# Altium PCB Lampda_PCB_V1_1.pcbdoc (part 2 of 2)
Units mm, origin at the board's own origin, x right, y up, seen from the top; angles counter-clockwise.
Board outline 71.29 x 71.78 mm, 2 copper layers (Top Layer, Bottom Layer); 128 components, 139 nets, 552 pads, 271 vias.
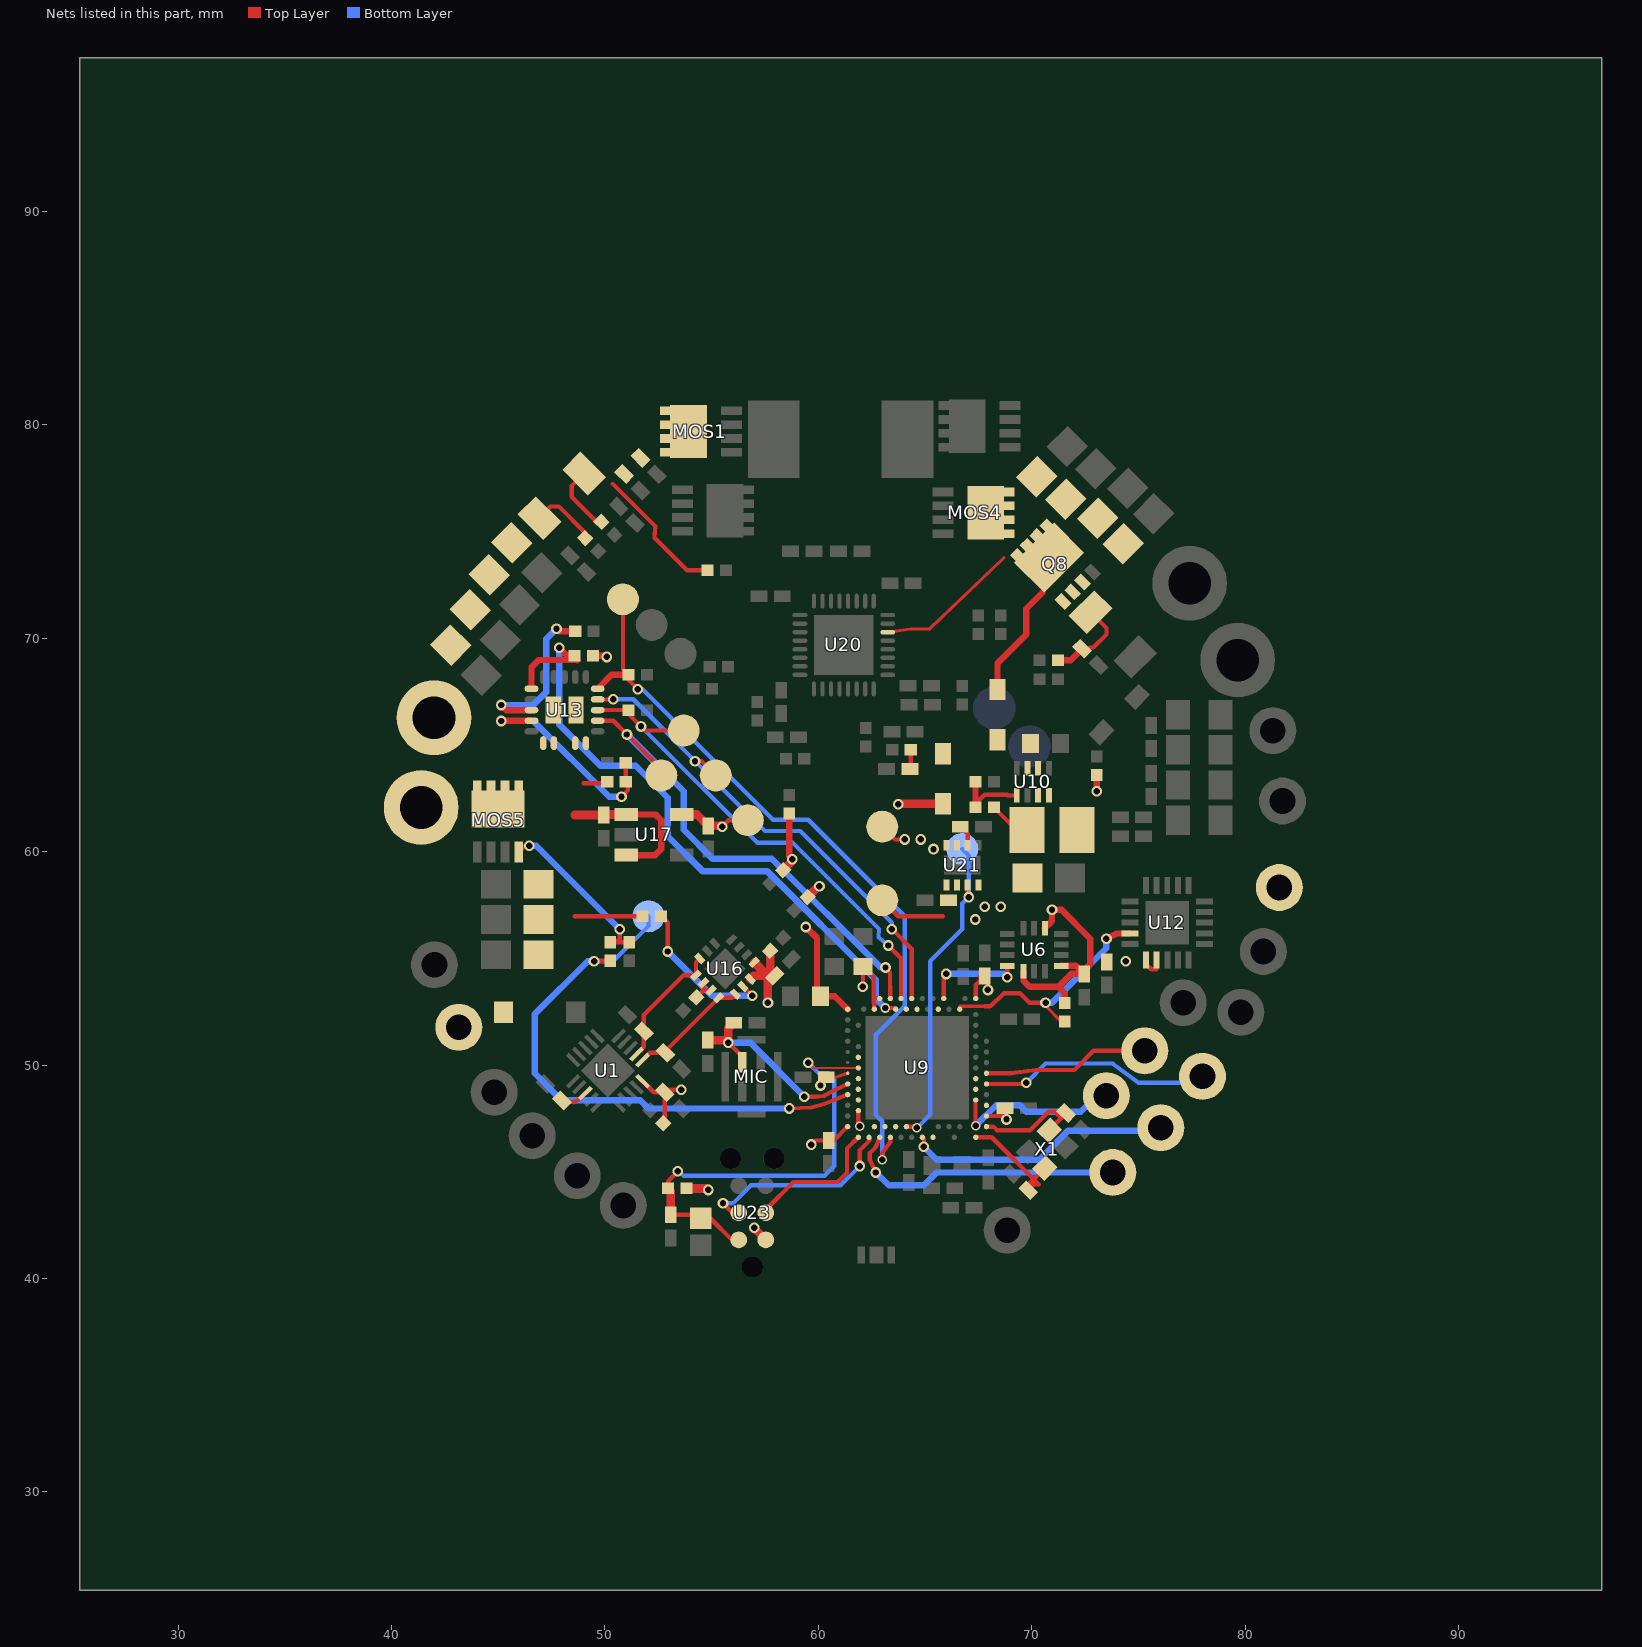
[diagram p2: the nets of this part, all layers, seen from the top]

## Via types
v1: diameter 0.5, hole 0.3, Top Layer to Bottom Layer, tented both sides, 261 vias
v2: diameter 0.45, hole 0.3, Top Layer to Bottom Layer, tented both sides, 10 vias

## Nets (pads, with @x,y where several pads share a name; then routed paths per layer and width w, separated by ;. In a path a pad name is that pad's centre, name@x,y a point inside that pad or via, vN(x,y) a via of type N, cw(c..) or ccw(c..) an arc to the next point about the centre after c; other vN are vias at no path point) (continued)
OUT_CC1: C10.2 U1.12 U16.10 U16.11 | length 6
  Top Layer w0.2: U1.12@51.484,50.514 51.82,50.851 C10.2@51.82,51.583 51.82,52.354 53.673,54.206 U16.11@54.263,54.206 54.263,54.811 U16.10@54.44,54.987
OUT_CC2: C6.1 U1.11 U16.1 U16.14 | length 5.7
  Top Layer w0.2: U1.11@51.766,50.231 52.111,50.576 C6.1@52.828,50.576 ; C6.1@52.828,50.576 52.828,50.65 U16.14@55.324,53.145 ; U16.14@55.324,53.145 55.928,53.145 U16.1@56.105,53.322
P0.00: U9.D2 U12.14 U24.1 | length 11.3
  Top Layer w0.152: 66.628,52.752 67.799,52.755 ; v1@70.638,52.916 70.638,52.766 71.373,52.034 U24.1@71.539,52.034
  Top Layer w0.2: 67.799,52.758 68.05,52.755 68.69,53.365 69.44,53.365 69.888,52.917 v1(70.639,52.917)
  Top Layer w0.3: v1@73.488,55.916 73.984,56.162 U12.14@74.59,56.166
  Bottom Layer w0.3: v1(70.639,52.917) 70.939,52.917 73.488,55.466 v1@73.488,55.916
  other v1: 73.489,55.917
P0.07: U9.M2
P0.08: pad.11 U9.N1 U13.4 | length 23.3
  Top Layer w0.2: U13.4@49.658,67.128 v1(50.394,67.136) ; v1(54.217,64.237) 54.519,64.237 pad.11@55.189,63.567 ; v1(63.439,56.366) 64.367,55.438 U9.N1@64.367,53.114
  Bottom Layer w0.2: v1(50.394,67.136) 51.322,67.135 v1(54.217,64.237) 56.26,62.193 57.494,60.957 59.147,60.957 63.44,56.665 v1(63.439,56.366)
P0.09: pad.@76.038,47.067 U9.L24 | length 12.5
  Top Layer w0.2: U9.L24@64.868,46.613 64.939,46.542 v1(64.939,46.167)
  Bottom Layer w0.3: v1@64.939,46.167 65.538,45.568 70.339,45.568 71.69,46.916 76.038,46.916 pad.@76.038,47.067
P0.10: U9.J24
P0.11: U9.T2 U13.11 U15.1 | length 30.6
  Top Layer w0.2: v2(63.123,52.67) 63.561,52.67 U9.T2@63.618,52.614
  Top Layer w0.3: U13.11@46.558,67.627 46.559,68.633 46.895,68.971 U15.1@48.698,68.969 ; v1(47.854,69.549) 48.236,69.167 U15.1@48.563,69.167
  Bottom Layer w0.3: v1(47.854,69.549) 47.855,65.951 49.79,64.016 51.439,64.016 52.94,62.517 52.94,60.716 54.588,59.068 57.613,59.068 62.688,53.993 62.688,53.119 v2@63.138,52.667
P0.16: U9.AC11
P0.19: U9.AC15
P0.20: C46.1 C58.2 MIC.1 U9.AD16 | length 10
  Top Layer w0.2: v1(55.772,51.051) 56.438,50.385 MIC.1@56.438,50.125 ; v1(59.335,48.514) 59.869,48.509 60.25,48.549 60.585,48.74 U9.AD16@61.367,49.113
  Top Layer w0.4: C46.1@54.819,51.167 55.656,51.167 v1(55.772,51.051) 55.772,51.724 C58.2@56.033,51.985
  Bottom Layer w0.3: v1(55.772,51.051) 56.798,51.051 v1(59.335,48.514)
P0.21: U9.AC17
P0.23: U9.AC19
P0.25: U9.AC21 | length 0.8
  Top Layer w0.2: U9.AC21@61.868,47.863 61.868,47.197 v2(61.932,47.132)
P0.26: U6.4 U9.G1 | length 4.7
  Top Layer w0.2: U9.G1@65.868,53.113 65.868,54.267 v1(65.989,54.267) ; v1(68.839,54.116) 68.839,54.645 U6.4@68.842,54.647
  Bottom Layer w0.3: v1(65.989,54.267) 68.689,54.267 v1(68.839,54.116)
P0.27: U9.H2
P1.01: U9.Y23
P1.02: pad.@73.788,44.967 U9.W24 | length 13.5
  Top Layer w0.2: v1@62.688,44.966 v1(62.689,44.967) 62.409,45.547 62.409,45.885 62.688,46.167 ; 62.689,46.167 U9.W24@62.868,46.613
  Bottom Layer w0.3: v1(62.689,44.967) 63.29,44.366 64.939,44.366 65.538,44.966 70.339,44.966 pad.@73.789,44.967
P1.03: U9.V23
P1.05: U9.T23
P1.07: pad.10@66.739,60.117 U9.P23 U21.3 | length 15.3
  Top Layer w0.2: U9.P23@64.118,47.113 64.557,47.113 v2(64.613,47.057) ; U21.3@66.989,58.439 66.989,57.916 v1(67.039,57.867)
  Bottom Layer w0.2: v2(64.613,47.057) 65.238,47.681 65.238,54.867 66.74,56.365 66.74,57.567 v1(67.039,57.867) ; pad.10@66.739,60.117 67.039,59.817 v1(67.039,57.867)
P1.08: U9.P2
P1.09: pad.3 U8.2 U9.R1 U13.3 | length 23.3
  Top Layer w0.2: U13.3@49.658,66.628 U8.2@51.104,66.628 51.104,66.444 v1(51.688,65.861) 51.882,65.666 pad.3@53.689,65.666 ; v1(63.27,55.599) 63.869,54.999 U9.R1@63.868,53.113
  Bottom Layer w0.2: v1@51.688,65.86 57.131,60.416 58.789,60.416 62.838,56.368 62.81,55.987 v1(63.27,55.599)
P1.10: U9.A20
P1.11: pad.@73.487,48.568 U9.B19 | length 8.2
  Top Layer w0.2: v2(67.36,47.155) 67.36,48.355 U9.B19@67.368,48.363
  Bottom Layer w0.3: v2@67.359,47.155 68.322,48.118 69.437,48.118 69.739,47.816 72.289,47.816 73.039,48.567 pad.@73.487,48.568
P1.12: U9.B17
P1.13: pad.@77.989,49.467 U9.A16 | length 10.9
  Top Layer w0.2: U9.A16@67.868,49.113 69.686,49.113 v1(69.739,49.167)
  Bottom Layer w0.2: v1(69.739,49.167) 70.639,50.067 73.789,50.067 74.989,49.167 77.689,49.167 pad.@77.989,49.467
P1.14: U9.B15
P1.15: pad.@75.287,50.668 U9.A14 | length 7.8
  Top Layer w0.2: U9.A14@67.868,49.613 68.993,49.613 70.189,49.767 71.99,49.766 72.889,50.665 pad.@75.289,50.665
R2_1: MOS5.4 R1.2 R2.1 | length 8.3
  Top Layer w0.2: MOS5.4@45.964,59.981 46.261,60.278 v1(46.457,60.278) ; R1.2@50.239,55.749 R2.1@51.139,55.749 ; R1.2@50.239,55.749 50.522,55.75 50.689,55.916 v1(50.689,56.366)
  Bottom Layer w0.3: v1(46.457,60.278) 46.779,60.277 v1(50.689,56.366)
R9_2: C7.2 Q8.1 Q8.2 Q8.3 R9.2 RSR1.1 | length 4.1
  Top Layer w0.2: C7.2@72.354,69.502 72.889,69.566 73.489,70.166 73.489,70.466 RSR1.1@72.743,71.212
  Top Layer w0.3: R9.2@71.222,68.967 71.818,68.966 C7.2@72.354,69.502
R10_1: C23.1 C44.1 MOS1.5 MOS1.6 MOS1.7 MOS1.8 R10.1 R12.1 RAC1.2 | length 9.7
  Top Layer w0.2: RAC1.2@49.026,77.706 48.439,77.119 48.439,76.617 49.612,75.443 R12.1@49.833,75.443 ; 50.368,77.213 52.35,75.242 52.325,74.701 53.849,73.177 R10.1@54.812,73.177
R15_2: R15.2 U16.2 | length 7.2
  Top Layer w0.2: R15.2@52.622,56.967 52.939,56.667 v1(52.939,55.316) ; U16.2@56.459,53.676 v1(56.896,53.238)
  Bottom Layer w0.3: v1(52.939,55.316) 55.017,53.238 v1(56.896,53.238)
R19_1: R19.1 U16.12 U16.13 | length 1.7
  Top Layer w0.2: U16.12@54.617,53.853 54.617,53.499 ; U16.13@54.97,53.499 54.617,53.499 ; 54.617,53.499 R19.1@54.281,53.163 54.617,53.499
R20_2: C20.1 R20.2 | length 0.9
  Top Layer w0.2: C20.1@64.284,63.866 64.322,63.904 R20.2@64.322,64.767
RESET: C28.2 pad.1@54.483,42.824 U4.1 U9.AC13 U23.2 | length 21.6
  Top Layer w0.102: v1(59.523,50.107) 59.767,49.863 U9.AC13@61.868,49.863
  Top Layer w0.2: U4.1@52.956,44.217 52.956,44.558 v1(53.415,45.016) ; C28.2@53.086,42.988 54.319,42.989 pad.1@54.483,42.824 ; pad.1@54.483,42.824 54.931,42.824 55.947,41.808 U23.2@56.261,41.808
  Top Layer w0.4: U4.1@52.956,44.217 53.086,44.087 C28.2@53.086,42.988
  Bottom Layer w0.2: v1@53.405,45.016 53.689,44.817 60.288,44.816 60.74,45.265 60.74,49.317 60.448,49.609 60.021,49.609 v1(59.523,50.107)
S$72260: 
S$72264: 
S$72268: 
S$72290: 
S$72297: 
S$72301: 
S$72368: 
S$72378: 
S$72382: 
S$72386: 
S$334299: 
S$334303: 
S$488258: 
S$488268: 
S$488275: 
S$488287: 
S$488291: 
S$573256: 
S$573287: 
STRIP+: C32.1 C34.1 C35.1 C52.1 pad.@41.989,66.267 R11.2 RAC1.1 U13.16 U13.17 U13.22 | length 3.2
  Top Layer w0.2: RAC1.1@46.935,75.616 46.935,75.664 47.438,76.167 47.839,76.167 49.071,74.933 R11.2@49.071,74.681
STRIP-: MOS5.5 MOS5.6 MOS5.7 MOS5.8 pad.@41.389,62.067
STRIP_OUT_DRV: pad.12 R1.1 U9.AD18 | length 26.5
  Top Layer w0.2: v1(49.489,54.867) 49.506,54.884 R1.1@50.239,54.884 ; v1(58.639,47.967) 59.666,48.014 60.27,48.171 U9.AD18@61.367,48.613
  Bottom Layer w0.2: v1@49.488,54.867 50.39,54.867 52.038,56.518 pad.12@52.038,56.967
  Bottom Layer w0.3: v1@49.488,54.867 49.188,54.867 46.712,52.39 46.712,49.609 47.966,48.354 51.652,48.354 52.041,47.965 v1(58.639,47.967)
SWDCLK: U9.AA24 U23.4 | length 9.6
  Top Layer w0.2: v1(55.527,43.524) 55.973,43.078 U23.4@56.261,43.078 ; v1(61.939,45.267) 61.939,46.017 62.385,46.462 U9.AA24@62.385,46.6
  Bottom Layer w0.2: v1@55.513,43.52 55.993,43.52 56.839,44.366 61.04,44.366 v1@61.939,45.268
SWDIO: U9.AC24 U23.3 | length 6.5
  Top Layer w0.2: U23.3@57.531,43.078 57.532,43.223 58.825,44.516 60.89,44.516 61.34,44.966 61.34,46.086 U9.AC24@61.868,46.614
U1_3: C11.1 U1.3 | length 1.1
  Top Layer w0.2: C11.1@48.159,48.326 48.54,48.253 48.797,48.395 U1.3@49.079,48.677
U10_1: R8.1 R13.2 U10.1 | length 3.5
  Top Layer w0.2: R13.2@67.356,62.067 67.356,62.235 67.788,62.666 68.838,62.666 68.878,62.627 U10.1@69.289,62.627
  Top Layer w0.3: R13.2@67.356,62.067 R8.1@67.356,63.266
U10_4: L3.1 U10.4
U10_6: C60.2 D1.1 D2.1 U10.6 U10.7
U12_16: C22.2 R31.1 U12.16 U12.17 | length 11.4
  Top Layer w0.2: U12.16@75.34,54.916 75.34,54.734 75.589,54.486 75.84,54.486 ; 75.84,54.486 U12.17@75.84,54.916 75.84,54.486
  Top Layer w0.3: v1(73.038,62.817) R31.1@73.039,63.584
  Mid-Layer 2 w0.3: v1(73.038,62.817) 73.488,62.817 74.54,61.768 74.54,54.867 v1(74.389,54.867)
U13_13: R5.2 U13.13 | length 8
  Top Layer w0.3: v1(45.139,66.867) 45.378,66.628 U13.13@46.558,66.628 ; v1(47.727,70.438) 47.848,70.316 R5.2@48.606,70.316
  Bottom Layer w0.3: v1(45.139,66.867) 46.638,66.865 47.24,67.467 47.24,69.949 v1(47.727,70.438)
U13_14: R6.1 R7.1 U13.14 | length 10.3
  Top Layer w0.2: v1(50.775,62.564) 51.081,62.869 51.081,63.199 50.972,63.307 R6.1@50.972,64.166
  Top Layer w0.3: v1(45.139,66.116) 45.149,66.126 U13.14@46.558,66.128
  Bottom Layer w0.3: v1(45.139,66.116) 46.639,66.116 50.193,62.563 v1(50.775,62.564)
U21_6: C29.1 U21.6 | length 1
  Top Layer w0.2: C29.1@66.644,61.167 66.988,60.822 U21.6@66.988,60.294
V33: C37.1 C40.1 C41.1 C48.2 C51.1 C55.1 C57.2 L3.2 pad.9@62.989,57.717 pad.@81.589,58.317 R13.1 U4.2 U9.A22 U9.AD14 U9.AD23 U9.B1 U9.W1 U9.Y2 U10.3 U21.1 U21.2 U21.4 U23.1 | length 81
  Top Layer w0.152: C41.1@60.362,49.428 60.761,49.421 U9.AD14@61.368,49.613
  Top Layer w0.2: v1(59.665,46.274) 59.86,46.469 C40.1@60.476,46.469 60.725,46.469 U9.AD23@61.367,47.114 ; v1(62.078,53.674) 62.089,53.684 C37.1@62.089,54.617 62.589,54.116 62.589,53.167 U9.W1@62.868,53.113 ; 62.589,53.167 U9.Y2@62.617,52.614 ; pad.9@62.989,57.717 63.739,56.967 65.839,56.967 ; U9.B1@67.368,53.113 67.368,53.75 C55.1@67.789,54.171 ; C55.1@67.539,54.144 67.762,54.144 C55.1@67.789,54.171 ; U9.A22@67.867,47.615 68.637,47.615 68.744,47.722 68.744,47.965 68.744,47.516 v1(68.809,47.451) ; v1(67.939,53.517) 67.939,54.021 C55.1@67.789,54.171 ; R13.1@68.222,62.067 69.272,61.016 L3.2@69.772,61.017
  Top Layer w0.4: U4.2@53.822,44.217 54.771,44.217 v1(54.839,44.149) ; v1(56.998,42.371) 56.998,42.341 U23.1@57.531,41.808
  Mid-Layer 2 w0.4: v1(54.839,44.149) 54.84,47.018 57.138,49.317 59.689,49.317 v1@60.097,49.04 ; v1(56.998,42.371) 56.999,43.175 59.089,45.265 59.089,45.717 v1(59.665,46.274) 62.539,49.467 62.539,52.467 ; 59.723,49.456 60.098,49.081 v1(60.098,49.04) ; v1(62.078,53.674) 63.445,53.673 65.492,55.72 66.242,55.72 v1(67.339,56.816) ; 62.539,53.667 62.538,51.265 60.59,49.317 v1@60.097,49.04 ; 67.336,54.414 67.336,54.864 68.088,55.616 68.088,57.117 v1@67.789,57.417 ; v1(67.939,53.517) 67.939,53.816 67.339,54.417 67.339,53.157 67.489,52.738 67.535,48.725 v1(68.809,47.451) ; v1@68.53,57.412 68.688,57.267 68.69,55.463 69.953,54.201 75.073,54.201 76.79,55.916 79.188,55.916 pad.@81.588,58.316
  other v1: 67.789,57.416 68.539,57.416
V33_EXT: C2.2 C3.2 C47.2 pad.9@62.989,61.167 R17.2 R32.2 R33.2 U1.10 U3.1 U5.2 U6.5 U6.8 U6.12 U15.2 U16.3 U16.4 U21.7 U21.8 U24.2 | length 77.2
  Top Layer w0.2: U1.10@51.766,49.241 52.283,48.725 C2.2@52.803,48.725 52.925,48.848 v1(53.569,48.848) ; R17.2@52.733,47.27 52.802,47.27 C2.2@52.803,48.725 ; pad.9@62.989,61.167 63.589,60.567 v1(64.039,60.567)
  Top Layer w0.3: U15.2@49.43,69.168 50.038,69.168 v1(50.089,69.116) ; U5.2@58.639,61.784 58.639,59.779 v1(58.776,59.643) ; U6.5@69.604,54.385 69.605,53.952 69.889,53.668 71.24,53.668 ; U6.12@70.604,56.41 70.939,56.745 v1(70.939,57.267) 71.389,57.267 72.739,55.917 72.739,54.716 72.442,54.419 C47.2@72.441,54.268 71.84,54.267 71.24,53.668 ; U6.8@71.366,54.647 72.061,54.647 C47.2@72.441,54.268 ; U24.2@71.539,52.899 71.539,53.369 71.24,53.668
  Top Layer w0.4: U16.3@56.812,54.029 56.964,54.181 C3.2@57.954,54.181 ; U16.4@56.989,54.811 57.618,54.181 C3.2@57.954,54.181 ; v1(57.633,52.912) C3.2@57.634,54.181 ; U3.1@57.733,55.347 57.733,54.181 C3.2@57.954,54.181 ; R33.2@58.345,59.132 58.776,59.564 v1(58.776,59.643) ; R32.2@59.488,57.862 59.998,58.373 v1(60.046,58.373)
  Mid-Layer 2 w0.4: v1(50.089,69.116) 53.838,69.116 55.487,67.467 60.588,67.467 64.639,63.116 64.639,61.767 65.389,61.167 v1(65.388,60.116) 66.747,58.758 69.711,58.758 70.939,57.53 v1(70.939,57.267) ; v1(53.569,48.848) 54.456,48.847 57.634,52.022 57.634,52.949 58.952,54.267 60.141,54.267 64.789,58.915 v1(64.789,60.567) ; v1(58.776,59.643) v1(60.046,58.373) ; 59.475,58.936 60.057,59.517 62.991,59.517 v1(64.039,60.567)
VBUS: C24.2 C27.2 C30.2 C39.2 pad.@43.155,51.769 R7.2 R15.1 U11.1 U13.19 U13.20 U13.21 U17.1 U17.3 | length 11.7
  Top Layer w0.2: 48.589,56.967 R15.1@51.756,56.967 ; 48.998,63.198 R7.2@50.214,63.198
  Top Layer w0.3: U17.3@50.999,59.836 52.358,59.836 52.639,60.116 52.639,61.467 52.37,61.735 U17.1@50.999,61.735
  Top Layer w0.4: 48.589,61.712 C39.2@49.939,61.712 ; C39.2@49.939,61.712 49.963,61.735 U17.1@50.999,61.735
VBUS5: C21.2 C45.1 D1.2 pad.4 U9.AD2 U17.5 | length 25.8
  Top Layer w0.2: v1(55.489,61.167) 55.789,61.466 pad.4@56.689,61.467
  Top Layer w0.3: v1(59.411,56.468) 59.932,55.946 59.932,53.216 C45.1@60.089,53.217 ; C45.1@60.089,53.217 60.765,53.217 U9.AD2@61.368,52.613
  Top Layer w0.4: U17.5@53.599,61.735 54.306,61.735 C21.2@54.839,61.204 55.437,61.204 v1(55.489,61.167) ; v1(63.739,62.217) 63.767,62.244 D1.2@65.839,62.244
  Mid-Layer 2 w0.3: v1(55.489,61.167) 55.64,61.166 59.412,57.394 v1(59.411,56.468)
  Mid-Layer 2 w0.4: v1(55.489,61.167) 62.688,61.166 63.115,61.592 v1(63.739,62.217)
VBUS_GATE_DRV: pad.2 U9.U1 U13.2 | length 23.5
  Top Layer w0.2: U13.2@49.658,66.128 50.386,66.128 v1(51.029,65.485) 52.639,63.874 pad.2@52.639,63.567 ; v1@63.138,54.567 63.355,54.338 U9.U1@63.368,53.113
  Bottom Layer w0.3: v1(51.029,65.485) 53.689,62.824 53.689,61.016 55.038,59.667 57.814,59.667 62.914,54.567 v1@63.138,54.567
  other v1: 63.139,54.567
VSBUS_DSCH: pad.@50.839,71.817 U2.2 U9.U24 U13.5 | length 36.4
  Top Layer w0.2: pad.@50.839,71.817 50.839,68.544 U2.2@51.104,68.279 51.104,68.039 v1(51.542,67.601) ; v2(62.989,45.567) 62.989,45.867 63.369,46.396 U9.U24@63.368,46.613
  Top Layer w0.3: U13.5@49.658,67.627 50.309,68.279 U2.2@51.104,68.279
  Bottom Layer w0.2: v1(51.542,67.601) 51.754,67.602 57.87,61.486 59.521,61.486 64.04,56.967 64.04,52.766 62.688,51.417 62.688,47.666 62.991,47.366 v2(62.989,45.567)
VSYS: C18.2 C19.2 C36.2 C56.2 D2.2 MOS4.5 MOS4.6 MOS4.7 MOS4.8 Q8.5 Q8.6 Q8.7 Q8.8 Q8.9 U20.22 | length 12.2
  Top Layer w0.152: U20.22@63.247,70.277 64.314,70.419 65.213,70.439 68.689,73.766
  Top Layer w0.3: D2.2@68.389,67.589 68.389,68.816 69.739,70.166 69.739,71.366 70.489,72.116
XC1: C31.2 U9.B24 X1.1 | length 5.9
  Top Layer w0.2: U9.B24@67.367,46.614 68.121,46.614 70.334,44.402 70.087,44.402 C31.2@69.825,44.131 69.828,44.392 X1.1@70.608,45.17
XC2: C16.2 U9.A23 X1.3 | length 5.2
  Top Layer w0.2: U9.A23@67.867,47.114 68.192,47.114 68.365,46.942 69.915,46.942 70.789,47.817 71.089,47.817 71.375,47.506 ; X1.3@70.82,46.937 70.821,46.97 C16.2@71.604,47.752
pads on no net: F1.2 U1.1 U1.2 U1.14 U1.15 U6.10 U6.11 U9.A18 U9.AB2 U9.B3 U10.2 U12.9 U12.10 U12.15 U13.6 U13.7 U13.8 U13.9 U13.10 U17.4 U23. U23.5

## Polygon pours and split planes (outlines as drawn)
GND on Mid-Layer 1 (solid): 44.069,79.273 60.071,84.48 75.311,80.67 81.153,73.304 82.939,67.317 83.989,61.467 83.539,57.867 63.439,58.016 62.389,58.916 61.639,58.767 61.639,58.016 63.439,56.367 83.539,56.216 83.389,53.067 79.883,46.761 67.639,38.967 67.639,44.517 57.76,44.53 57.76,38.561 44.45,43.84 38.1,57.048 38.735,65.557
VBUS on Top Layer (solid): 47.389,52.167 42.139,49.317 40.615,52.023 44.539,54.117 45.889,54.117 45.889,59.667 46.639,60.716 46.639,62.366 48.139,64.016 48.139,67.317 49.099,67.317 49.124,65.866 49.489,65.366 49.489,62.817 49.039,61.767 49.039,55.317
BAT+ on Top Layer (solid): 75.139,70.166 77.539,70.016 80.989,71.816 82.639,68.216 79.489,66.717 79.489,65.666 78.289,65.666 78.289,67.166 76.189,67.166 76.189,66.566 74.839,66.566 73.789,67.616 73.789,68.816
GND on Top Layer (solid): 70.231,81.559 76.708,79.654 79.756,75.844 80.989,72.116 77.689,70.316 76.939,70.316 75.419,71.122 74.839,72.866 76.073,74.066 73.787,76.352 72.39,77.495 71.628,77.749 70.739,78.638 69.739,77.816 68.239,77.816 68.239,80.366
STRIP+ on Top Layer (solid): 42.418,77.495 46.101,77.241 48.006,75.463 47.089,74.516 45.739,73.016 44.689,71.366 43.789,69.716 43.053,68.732 42.901,68.025 45.589,65.366 47.092,65.358 47.089,67.317 47.989,67.317 47.981,64.469 47.389,63.866 43.939,63.866 39.289,64.766 39.243,66.446
R10_1 on Top Layer (solid): 52.324,81.813 54.439,82.466 54.889,82.016 54.889,78.566 54.739,78.416 52.339,78.416 50.989,77.066 49.276,76.606 46.99,78.892
CH_SW1 on Top Layer (solid): 55.339,80.366 56.539,80.366 56.539,81.116 56.839,81.416 59.539,81.416 59.472,74.139 59.989,73.616 59.989,71.216 59.389,71.216 56.239,74.666 54.739,74.666 54.739,78.116 55.339,78.566
CH_SW2 on Top Layer (solid): 62.689,81.416 67.639,81.416 67.818,81.178 67.818,78.257 66.548,77.241 66.548,74.701 65.024,73.177 65.024,71.399 64.516,70.764 64.135,70.256 62.865,70.256 62.839,71.066 62.689,71.216 62.689,77.516
VSYS on Top Layer (solid): 66.866,77.241 69.406,77.241 70.549,78.384 71.311,78.384 75.883,73.812 74.93,72.923 73.406,72.923 72.644,72.669 71.184,71.272 68.136,74.193 66.866,74.574
GND on Top Layer (solid): 46.039,73.166 47.239,74.366 49.489,72.116 46.039,68.066 45.589,68.066 45.289,67.766 45.289,67.317 44.539,66.717 42.774,68.279 44.839,71.666
GND on Top Layer (solid): 39.599,55.325 40.742,52.404 44.389,54.117 45.589,54.117 45.568,60.405 43.536,60.405 42.589,59.967 38.989,59.516
STRIP- on Top Layer (solid): 38.989,64.316 43.339,63.566 46.203,63.58 46.457,63.199 46.457,60.659 43.536,60.659 42.774,59.643 38.71,59.643
U10_6 on Top Layer (solid): 70.489,65.816 70.489,63.417 69.439,63.417 69.439,64.616 68.839,64.616 67.939,64.016 65.389,64.016 65.389,65.366 65.989,65.816
V33 on Top Layer (solid): 68.839,62.067 68.839,59.516 68.373,58.858 65.689,58.916 65.689,56.216 67.789,56.216 68.239,56.816 69.739,56.816 69.739,57.717 70.489,57.717 70.489,62.966 70.109,62.932 70.189,62.067
U10_4 on Top Layer (solid): 70.639,62.966 72.036,62.966 72.889,62.217 72.889,59.816 71.239,59.816 71.239,61.767 70.939,61.767 70.639,62.217
GND on Top Layer (solid): 48.139,54.117 49.789,54.117 50.089,53.817 50.089,51.117 51.41,49.737 50.14,48.467 48.87,49.737 48.889,50.517 48.139,51.267
GND on Top Layer (solid): 70.789,66.566 72.439,66.566 72.439,63.417 71.239,63.417 70.639,63.417 70.639,64.316 70.789,64.316
GND on Top Layer (solid): 68.428,56.468 70.46,56.468 70.841,55.96 70.841,54.055 69.571,54.055 69.571,54.563 69.317,54.817 68.555,54.817 68.428,54.944
GND on Top Layer (solid): 53.823,56.214 54.585,56.849 54.966,56.849 56.998,54.69 55.601,53.293 54.585,54.436 54.331,55.071 53.823,55.706
GND on Top Layer (solid): 65.839,59.816 67.339,59.816 67.339,61.467 68.389,61.467 68.389,59.516 67.939,58.916 65.839,58.916
GND on Top Layer (solid): 51.139,76.916 52.339,78.116 54.289,78.116 54.289,74.966 53.089,74.966
V33_EXT on Top Layer (solid): 65.089,61.017 65.389,60.716 66.739,60.716 66.739,59.967 65.839,59.967 65.539,59.667 65.239,59.667 64.789,60.116 63.889,60.116 63.589,60.416 63.589,60.716 63.889,61.017
GND on Top Layer (solid): 55.489,50.067 56.839,50.067 56.839,48.267 57.889,48.267 57.889,46.767 55.489,46.767
GND on Top Layer (solid): 71.089,59.516 73.939,59.516 73.939,58.016 71.089,58.016
GND on Top Layer (solid): 76.189,58.016 76.189,60.416 77.689,60.416 78.289,59.816 78.289,58.317 77.839,57.867 77.839,55.467 75.139,55.467 75.139,57.416 74.089,57.416 74.089,58.016
GND on Top Layer (solid): 78.289,62.217 79.489,62.217 80.689,61.017 80.689,60.116 80.389,59.816 78.739,59.816 78.289,60.267
U12_16 on Top Layer (solid): 76.039,55.317 76.039,54.417 73.189,54.417 73.189,55.317

## Keep-outs
Keep-Out Layer:
  lines w0.254 net S$573256: 39.277,59.208 cw(c61.189,61.167) 73.478,42.919 ; 39.279,59.208 cw(c39.439,57.717) 39.747,56.249
  lines w0.254 net S$573287: 39.76,56.251 ccw(c61.204,61.166) 70.882,41.41 ; 70.872,41.431 cw(c72.188,42.151) 73.46,42.945

## Other copper
Top Layer:
  drawing of 516 lines, arcs and shapes, not listed
Mid-Layer 2:
  region net V33: 81.658,57.219 80.491,58.386 80.389,57.399 80.672,57.116
  region net CH_VDDA: 57.539,68.202 57.273,68.466 57.423,68.564 57.636,68.352
  region net CH_VDDA: 68.554,71.916 68.29,71.65 68.192,71.8 68.403,72.013
  region net VBUS5: 55.655,61.354 55.654,60.979 55.829,60.966 55.83,61.366
  region net VBUS5: 55.721,61.259 55.552,60.925 55.721,60.872 55.864,61.154
  region net VBUS5: 59.599,56.633 59.224,56.633 59.262,56.808 59.562,56.808
  region net VBUS5: 63.755,61.967 63.49,62.232 63.357,62.117 63.64,61.834
  region net V33: 60.066,49.288 59.856,48.977 59.704,49.065 59.928,49.397
  region net V33: 60.334,48.958 60.15,49.285 60.297,49.381 60.492,49.032
  region net V33: 60.134,49.288 59.848,49.046 59.725,49.171 60.032,49.43
  region net V33: 59.915,46.271 59.637,46.522 59.745,46.661 60.042,46.393
  region net V33: 59.677,46.024 59.416,46.294 59.281,46.181 59.56,45.894
  region net V33: 62.244,53.861 62.243,53.486 62.418,53.473 62.419,53.873
  region net V33: 68.127,53.682 67.752,53.682 67.739,53.816 68.139,53.816
  region net V33: 68.825,47.7 68.56,47.435 68.427,47.55 68.71,47.833
  region net V33: 68.039,57.432 67.773,57.167 67.888,57.034 68.171,57.317
  region net V33: 55.027,44.314 54.652,44.314 54.64,44.489 55.04,44.489
  region net V33: 57.186,42.536 56.811,42.536 56.799,42.711 57.199,42.711
  region net V33_EXT: 60.062,58.622 59.797,58.357 59.664,58.472 59.947,58.755
  region net V33_EXT: 59.026,59.658 58.76,59.393 58.875,59.26 59.158,59.543
  region net V33_EXT: 50.254,68.929 50.254,69.304 50.429,69.316 50.429,68.916
  region net V33_EXT: 57.821,52.746 57.446,52.746 57.434,52.571 57.834,52.571
  region net V33_EXT: 57.883,52.915 57.598,53.159 57.702,53.3 58.007,53.039
  region net V33_EXT: 53.735,49.035 53.734,48.66 53.909,48.647 53.91,49.047
  region net V33_EXT: 71.127,57.432 70.752,57.432 70.739,57.53 71.139,57.53
  region net V33: 68.78,57.35 68.443,57.186 68.488,57.013 68.888,57.208
  region net V33_EXT: 64.976,60.401 64.601,60.401 64.589,60.226 64.989,60.226
  region net V33_EXT: 65.576,60.282 65.201,60.282 65.189,60.457 65.589,60.457
  region net V33_EXT: 65.637,60.132 65.373,59.867 65.488,59.734 65.77,60.018
  region net V33_EXT: 64.055,60.317 63.789,60.582 63.657,60.466 63.94,60.184
  region net V33: 67.354,56.567 67.09,56.833 66.957,56.718 67.239,56.435
  region net U12_16: 74.63,54.932 74.294,55.098 74.39,55.246 74.69,55.097
  region net U12_16: 73.203,63.004 73.203,62.629 73.378,62.667 73.378,62.967
Bottom Layer:
  region net AIN7: 70.954,51.079 70.954,51.454 71.129,51.417 71.129,51.117
  region net IMU_INT2: 66.606,53.301 66.367,53.062 66.492,52.964 66.704,53.176
  region net P0.08: 54.233,64.486 53.967,64.222 53.906,64.407 54.047,64.549
  region net P0.08: 54.466,64.253 54.201,63.987 54.387,63.926 54.528,64.067
  region net P1.02: 62.939,44.982 62.674,44.717 62.824,44.62 63.036,44.832
  region net P0.09: 65.189,46.182 64.924,45.917 65.074,45.82 65.286,46.032
  region net I2CM_SDA: 73.324,56.478 73.323,56.853 73.148,56.816 73.149,56.516
  region net I2CM_CLK: 73.324,57.604 73.324,57.229 73.149,57.267 73.149,57.567
  region net CELL2: 74.639,53.501 74.373,53.766 74.523,53.863 74.736,53.651
  region net CELL1: 78.539,55.001 78.273,55.266 78.424,55.363 78.636,55.151
  region net CELL0: 78.724,57.304 78.723,56.929 78.549,56.967 78.549,57.267
  region net CELL-: 78.724,57.829 78.724,58.204 78.549,58.166 78.549,57.866
  region net CELL-: 75.774,59.951 75.399,59.952 75.436,59.777 75.736,59.776
  region net CELL2: 74.855,65.717 74.59,65.982 74.493,65.831 74.705,65.62
  region net CELL0: 75.175,62.651 74.8,62.652 74.837,62.476 75.137,62.476
  region net CELL1: 75.027,64.751 74.652,64.751 74.69,64.576 74.99,64.576
  region net P1.13: 69.989,49.151 69.723,49.416 69.909,49.478 70.05,49.336
  region net P1.07: 67.055,57.617 66.789,57.882 66.728,57.696 66.869,57.555
  region net P1.07: 67.226,58.032 66.851,58.032 66.939,58.207 67.139,58.207
  region net P1.11: 67.584,47.141 67.345,47.379 67.47,47.477 67.682,47.266
  region net VSBUS_DSCH: 63.159,45.715 62.821,45.716 62.89,45.873 63.09,45.872
  region net CH_CHARGE_OK: 63.813,45.854 63.574,46.093 63.734,46.155 63.875,46.014
  region net P1.07: 64.838,47.042 64.6,47.282 64.76,47.344 64.901,47.202
  region net CH_INT_N: 61.829,51.585 61.59,51.347 61.492,51.471 61.705,51.683
  region net P0.11: 63.144,52.895 62.898,52.663 62.804,52.79 63.022,52.996
  region net P0.26: 68.773,54.358 68.608,54.021 68.46,54.117 68.607,54.417
  region net P0.26: 66.155,54.079 66.155,54.454 66.33,54.417 66.33,54.117
  region net SWDCLK: 61.954,45.017 61.69,45.283 61.628,45.097 61.769,44.956
  region net RESET: 53.659,45.071 53.438,44.767 53.63,44.736 53.748,44.897
  region net SWDCLK: 55.695,43.71 55.69,43.335 55.866,43.42 55.868,43.62
  region net IMU_INT2: 72.127,54.948 71.862,55.212 71.765,55.062 71.977,54.85
  region net P0.11: 48.042,69.383 47.667,69.383 47.705,69.208 48.005,69.208
  region net DEC6: 69.155,52.517 68.89,52.782 68.792,52.632 69.004,52.42
  region net DEC6: 66.777,46.332 66.402,46.332 66.44,46.507 66.74,46.507
  region net CH_PROC_HOT: 66.177,56.531 65.802,56.532 65.89,56.707 66.09,56.707
  region net CH_EN_OTG: 64.976,56.532 64.601,56.532 64.689,56.707 64.889,56.707
  region net P0.08: 63.627,56.531 63.252,56.532 63.34,56.665 63.54,56.665
  region net VBUS_GATE_DRV: 63.037,54.795 62.926,54.436 62.764,54.505 62.864,54.829
  region net FAULT: 59.434,47.256 59.261,47.589 59.193,47.455 59.285,47.277
  region net FAULT: 52.289,46.931 52.023,46.667 52.208,46.605 52.35,46.746
  region net CH_INT_N: 59.196,56.02 59.195,55.645 59.37,55.682 59.371,55.982
  region net I2CM_SDA: 57.313,57.572 56.938,57.572 56.976,57.397 57.276,57.397
  region net I2CM_CLK: 58.329,56.556 57.954,56.556 57.992,56.381 58.292,56.381
  region net I2CM_SDA: 60.424,50.997 60.094,50.928 60.077,51.085 60.377,51.148
  region net I2CM_CLK: 60.952,51.382 60.614,51.382 60.633,51.539 60.933,51.539
  region net RESET: 59.773,50.123 59.507,49.858 59.693,49.796 59.834,49.937
  region net CH_BATDRV: 73.324,72.528 73.323,72.903 73.148,72.865 73.149,72.565
  region net P0.08: 50.56,67.323 50.559,66.948 50.734,67.035 50.735,67.235
  region net VSBUS_DSCH: 51.759,67.725 51.638,67.37 51.828,67.386 51.9,67.597
  region net VBUS_GATE_DRV: 51.279,65.5 51.013,65.235 51.164,65.138 51.376,65.35
  region net P1.09: 51.937,65.876 51.671,65.611 51.857,65.549 51.999,65.69
  region net CH_REGN: 53.789,67.601 53.523,67.866 53.673,67.964 53.886,67.752
  region net CH_REGN: 60.989,74.682 60.724,74.417 60.874,74.32 61.086,74.532
  region net P0.20: 59.351,48.764 59.085,48.499 58.988,48.649 59.201,48.861
  region net U13_13: 47.743,70.188 47.478,70.452 47.381,70.302 47.593,70.09
  region net U13_14: 50.61,62.376 50.609,62.751 50.434,62.713 50.435,62.413
  region net U13_13: 45.305,67.054 45.304,66.679 45.479,66.716 45.48,67.016
  region net U13_14: 45.304,65.929 45.304,66.304 45.479,66.266 45.479,65.966
  region net CC2: 50.707,47.372 50.614,47.008 50.466,47.133 50.516,47.333
  region net CC1: 51.515,47.719 51.25,47.454 51.188,47.639 51.33,47.781
  region net CC2: 49.587,47.046 49.587,47.421 49.762,47.333 49.762,47.133
  region net CC1: 48.871,47.583 48.871,47.958 49.046,47.87 49.046,47.67
  region net P1.09: 63.264,55.849 63.022,55.563 62.945,55.743 63.074,55.895
  region net CH_CHARGE_OK: 57.781,69.84 57.516,69.574 57.702,69.513 57.843,69.655
  region net CH_EN_OTG: 56.74,69.132 56.476,69.398 56.413,69.213 56.554,69.071
  region net CH_PROC_HOT: 60.468,66.272 60.203,66.537 60.141,66.352 60.282,66.21
  region net CH_SRN: 69.424,68.254 69.424,67.879 69.249,67.917 69.249,68.217
  region net CH_SRP: 69.424,68.779 69.424,69.154 69.249,69.117 69.249,68.817
  region net CH_BATDRV: 64.308,70.074 63.933,70.075 63.971,70.25 64.271,70.249
  region net CH_SRP: 65.405,69.679 65.405,70.054 65.58,70.016 65.58,69.717
  region net CH_SRN: 65.445,68.895 65.445,69.27 65.62,69.233 65.62,68.933
  region net CH_LODRV2: 68.727,81.251 68.352,81.251 68.339,81.076 68.739,81.076
  region net CH_HIDRV2: 65.905,73.975 65.592,74.181 65.482,74.044 65.823,73.82
  region net CH_HIDRV2: 63.623,71.637 63.358,71.903 63.473,72.035 63.755,71.752
  region net CH_LODRV2: 62.639,73.151 62.373,73.416 62.488,73.549 62.771,73.266
  region net CH_HIDRV1: 56.127,81.101 55.752,81.101 55.739,80.926 56.139,80.926
  region net CH_HIDRV1: 59.255,73.416 58.99,73.151 58.857,73.266 59.14,73.549
  region net CH_LODRV1: 60.849,72.928 60.583,73.193 60.451,73.077 60.735,72.795
  region net CH_LODRV1: 53.862,74.427 53.597,74.162 53.712,74.029 53.994,74.313
  region net P0.20: 55.937,50.864 55.937,51.239 56.112,51.201 56.112,50.901
  region net R15_2: 56.731,53.051 56.731,53.426 56.556,53.388 56.556,53.088
  region net R15_2: 53.189,55.332 52.924,55.067 53.074,54.97 53.286,55.182
  region net I2CM_SDA: 69.627,57.102 69.252,57.101 69.29,56.926 69.59,56.926
  region net I2CM_SDA: 69.627,57.432 69.252,57.432 69.289,57.607 69.589,57.607
  region net I2CM_CLK: 70.376,57.101 70.001,57.101 70.039,56.967 70.339,56.967
  region net I2CM_CLK: 70.377,57.432 70.002,57.432 70.039,57.607 70.339,57.607
  region net I2CM_SDA: 60.956,64.812 60.691,64.547 60.841,64.449 61.053,64.661
  region net I2CM_SDA: 60.894,64.962 60.519,64.962 60.607,65.137 60.807,65.137
  region net I2CM_CLK: 61.591,65.033 61.326,65.299 61.512,65.36 61.653,65.219
  region net I2CM_CLK: 61.516,64.87 61.497,65.245 61.673,65.216 61.688,64.916
  region net P1.11: 73.31,47.481 72.435,48.88 72.208,47.946 72.371,47.685
  region net AIN7: 80.908,54.219 79.741,55.385 79.834,54.523 80.046,54.311
  region net P0.09: 75.398,46.173 75.233,47.814 74.534,47.066 74.564,46.766
  region net P1.02: 73.062,44.141 73.061,45.791 72.291,45.116 72.292,44.816
  region net P1.13: 77.442,48.512 77.111,50.129 76.502,49.267 76.542,49.067
  region net I2CM_CLK: 69.228,65.667 69.227,64.167 68.528,64.817 68.528,65.017
  region net I2CM_SDA: 67.759,67.594 67.429,66.131 66.889,66.917 66.934,67.117
  region net P1.07: 67.422,59.807 66.347,59.477 66.939,59.11 67.139,59.171

## Silkscreen, mask and mechanical layers (free items; w line width, h text height)
Top Overlay:
  circle w0.254: c77.389,72.567 r2
  circle w0.254: c41.389,62.066 r2
  circle w0.254: c42.012,54.69 r1.397
  circle w0.254: c68.839,42.267 r1.397
  lines w0.254: 53.721,40.792 55.277,40.792 55.277,43.586 53.721,43.586 53.721,40.792
  lines w0.254 net S$72260: 44.552,50.245 45.441,50.118 47.981,47.07
  lines w0.254 net S$72264: 46.584,44.657 47.981,46.181 47.981,47.07
  lines w0.254 net S$72268: 47.982,46.18 48.871,46.307 52.114,44.28 52.51,43.388 51.284,41.481
  lines w0.254 net S$72290: 42.774,49.102 44.552,50.245
  lines w0.3 net S$488287: 79.639,59.967 83.089,59.816
  lines w0.3 net S$488291: 79.489,57.417 82.639,56.517
  lines w0.8 net S$72297: 60.023,62.927 60.775,61.842 61.583,60.682 62.055,60.006
  lines w0.8 net S$72301: 60.023,60.004 61.216,61.223
  text "7" at 78.963,54.509 h0.8 r191
  text "5" at 75.139,53.766 h0.8 r180
  text "3" at 73.489,51.667 h0.8 r180
  text "6" at 77.954,51.515 h0.8 r185
  text "1" at 72.139,49.716 h0.8 r180
  text "4" at 76.274,49.04 h0.8 r144
  text "2" at 74.089,46.867 h0.8 r180
  text "0" at 71.839,44.466 h0.8 r180
Bottom Overlay:
  circle w0.254: c77.389,72.567 r2
  circle w0.254: c42.012,54.69 r1.397
  circle w0.254: c41.389,62.066 r2
  circle w0.254: c68.839,42.267 r1.397
  lines w0.2 net S$72368: 57.735,39.631 57.887,39.631 62.84,44.584 ; 57.735,42.122 57.893,42.122 60.355,44.584
  lines w0.2 net S$72378: 59.989,39.267 65.355,44.584 65.616,44.584
  lines w0.2 net S$72382: 62.689,39.267 67.684,44.244
  lines w0.2 net S$72386: 65.389,39.567 67.466,41.613
  lines w0.254 net S$334299: 42.774,49.102 44.552,50.245 45.441,50.118 47.981,47.07 47.981,46.181 46.584,44.657
  lines w0.254 net S$334303: 47.982,46.18 48.871,46.307 52.282,44.209 52.553,43.387 51.284,41.481
  lines w0.3 net S$488258: 79.639,59.967 83.089,59.816
  lines w0.3 net S$488268: 79.489,57.416 82.639,56.517
  lines w0.3 net S$488275: 73.039,72.866 76.339,76.916
  lines w0.8 net S$72368: 57.735,39.632 57.735,44.585 67.489,44.667 67.489,40.167
  text "LAMP-DA" at 67.939,78.267 h3
  text "B-" at 76.06,70.234 h1 r40
  text "B+" at 78.239,67.033 h1 r30
  text "I2C" at 70.286,65.763 h1 r315
  text "λ" at 65.839,65.517 h15
  text "SYS+" at 47.602,64.124 h1 r350
  text "B1" at 79.96,63.997 h1 r20
  text "V1.1" at 63.589,62.817 h1.5
  text "B0" at 80.326,61.124 h1 r10
  text "SYS-" at 47.689,60.966 h1
  text "V33E_E" at 69.589,60.816 h1
  text "OUT_E" at 54.439,57.817 h1
  text "V33" at 79.852,57.674 h1 r350
  text "GND" at 46.587,55.096 h1 r15
  text "7" at 79.658,53.754 h0.8 r25
  text "5" at 75.589,52.966 h0.8
  text "VBUS" at 48.406,52.696 h1 r20
  text "3" at 73.939,50.867 h0.8
  text "6" at 78.404,50.718 h0.8 r355
  text "D-" at 48.395,49.581 h1 r35
  text "1" at 72.439,48.916 h0.8
  text "4" at 76.874,48.393 h0.8 r36
  text "D+" at 50.113,48.113 h1 r45
  text "CC1" at 52.047,47.256 h1 r50
  text "CC2" at 54.106,46.529 h1 r55
  text "2" at 74.689,46.067 h0.8
  text "0" at 72.289,43.666 h0.8
  text "ANT" at 64.466,40.301 h1.2